# EAGLE board sensor_v10 (EAGLE 7.2.0)
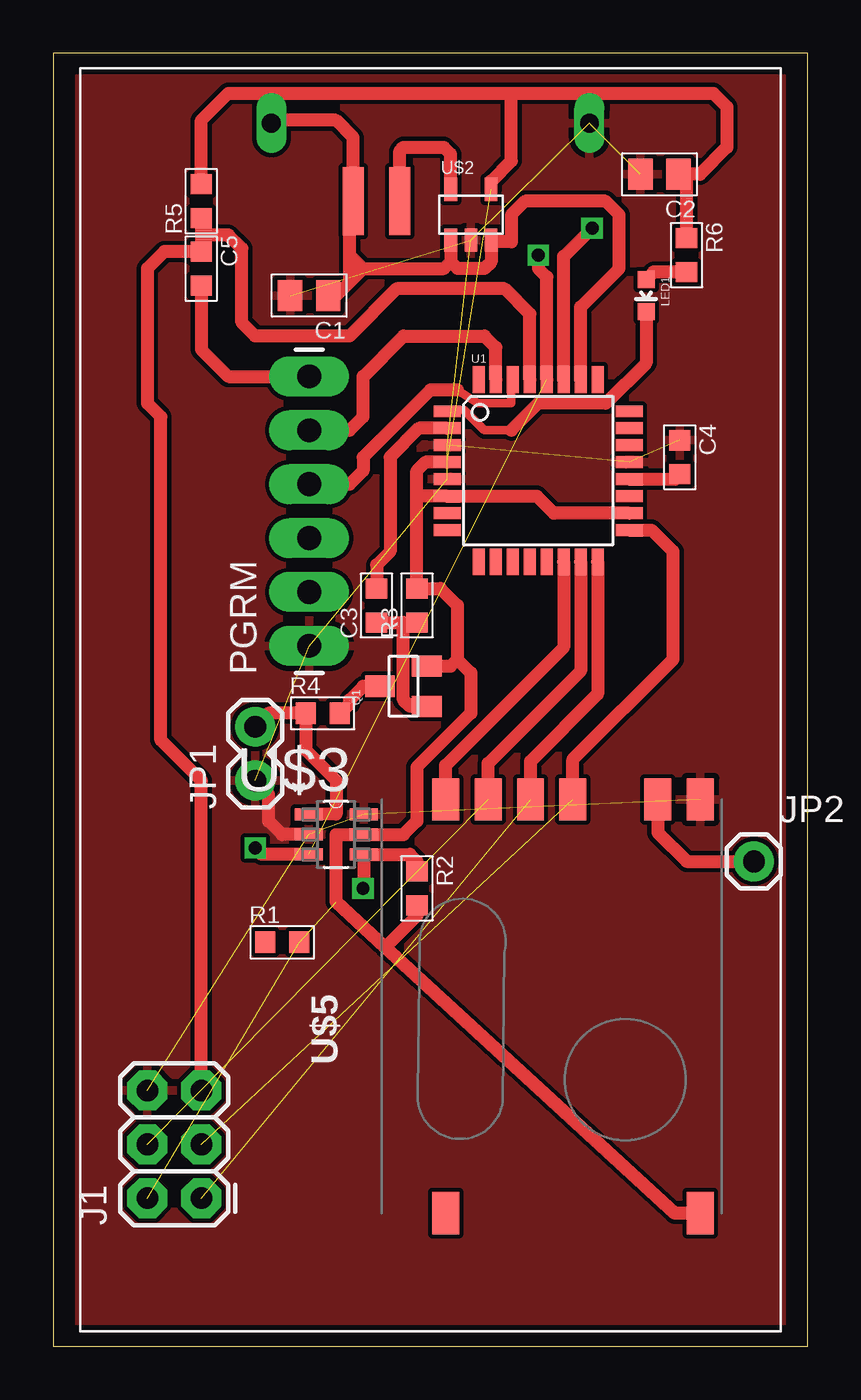
[diagram p0: board, top side]
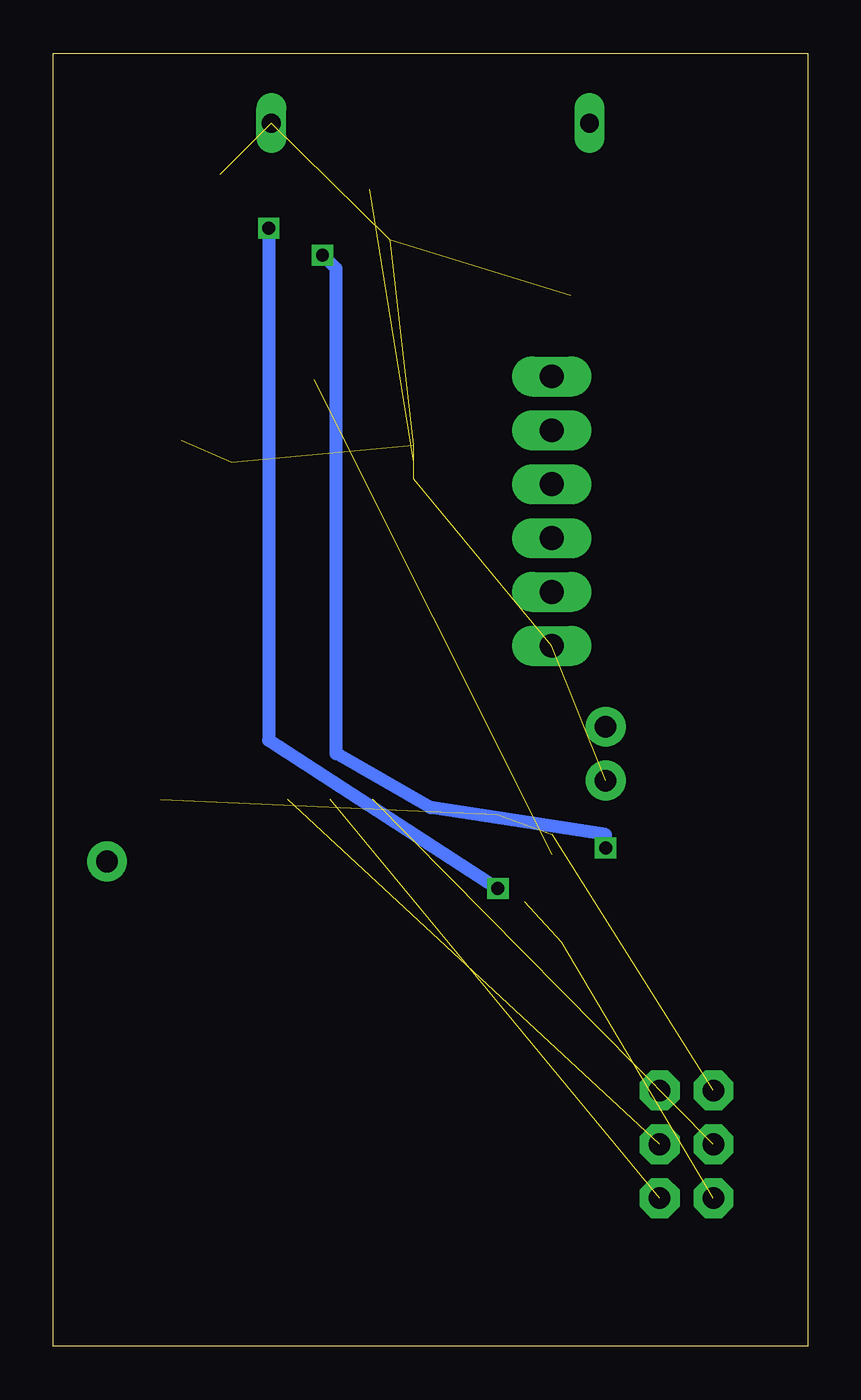
[diagram p1: board, bottom side, seen from below]

Size 35.56 x 60.96 mm. Coordinates in mm from the lower left corner, seen from the top.
Outline: 0,0 35.56,0 35.56,60.96 0,60.96 0,0
Copper layers (1*16): Top 0.035mm / dielectric 1.5mm / Bottom 0.035mm
Design rules "default": minimum track width 10mil, minimum drill 24mil, track to track 8mil, track to pad 8mil, pad to pad 8mil, via to via 8mil, smd to smd 8mil, copper to edge 40mil, drill to drill 8mil, minimum pad ring 10mil, minimum via ring 8mil, stop-mask expansion 4mil, vias tented up to drill 0mil, thermal gap 10mil

## Footprints (pad centres in the part's own frame; a part is rotated, then mirrored left to right if it is on the bottom)
C0805-N = smd 1.15 x 1.45: 1 -0.9,0; 2 0.9,0
C0603-N = smd 0.95 x 1: 1 -0.8,0; 2 0.8,0
2X3 = drill 1.016 pad 1.88 octagon: 1 0,0; 2 0,2.54; 3 2.54,0; 4 2.54,2.54; 5 5.08,0; 6 5.08,2.54
1X02 = drill 1.016 pad 1.88: 1 0,0; 2 2.54,0
1X01 = drill 1.016 pad 1.88: 1 0,0
LED-0603 = smd 0.8 x 0.8: A 0,-0.75; C 0,0.75
1X06_LONGPADS = drill 1.118 pad 1.88 long: 1 0,0; 2 2.54,0; 3 5.08,0; 4 7.62,0; 5 10.16,0; 6 12.7,0
SOT23 = smd 1 x 1.4: 1 -0.95,-1.1; 2 0.95,-1.1; 3 0,1.1
R0603-N = smd 0.95 x 1: 1 -0.8,0; 2 0.8,0
TQFP32-08 = smd 1.27 x 0.559: 1 -4.293,2.8; 2 -4.293,2; 3 -4.293,1.2; 4 -4.293,0.4; 5 -4.293,-0.4; 6 -4.293,-1.2; 7 -4.293,-2; 8 -4.293,-2.8; 17 4.293,-2.8; 18 4.293,-2; 19 4.293,-1.2; 20 4.293,-0.4; 21 4.293,0.4; 22 4.293,1.2; 23 4.293,2; 24 4.293,2.8 | smd 0.559 x 1.27: 9 -2.8,-4.293; 10 -2,-4.293; 11 -1.2,-4.293; 12 -0.4,-4.293; 13 0.4,-4.293; 14 1.2,-4.293; 15 2,-4.293; 16 2.8,-4.293; 25 2.8,4.293; 26 2,4.293; 27 1.2,4.293; 28 0.4,4.293; 29 -0.4,4.293; 30 -1.2,4.293; 31 -2,4.293; 32 -2.8,4.293
KEYSTONEAAHOLDER_2CELL = drill 0.889 pad 1.422 long: P$1 -7.493,27.178; P$2 7.493,27.178
SOT23-5 = smd 0.6 x 1.1: P$1 -0.95,-1.2; P$2 0,-1.2; P$3 0.95,-1.2; P$4 0.95,1.2; P$5 -0.95,1.2
SOT95P270X145-6N = smd 1.321 x 0.559: 1 -1.295,0.94; 2 -1.295,0; 3 -1.295,-0.94; 4 1.295,-0.94; 5 1.295,0; 6 1.295,0.94
WURTH_10UH_650MA = smd 3.2 x 1: P$1 0,-1.1; P$2 0,1.1
RFM69W-MINPADS = smd 2 x 1.27: ANA 8,-5; DIO0 -11.5,5; GND 8,-7; MISO 8,1; MOSI 8,3; NSS 8,5; SCK 8,-1; VDD -11.5,-7

## Placement (x,y rotation side)
C1  10uF  [C0805-N]  12.06,49.53 180 top
C2  10uF  [C0805-N]  28.57,55.24 180 top
C3  0.1uF  [C0603-N]  15.24,34.92 90 top
C4  0.1uF  [C0603-N]  29.53,41.91 270 top
C5  0.1uF  [C0603-N]  6.99,50.8 270 top
J1  AVR_SPI_PRG_6PTH  [2X3]  6.99,6.99 90 top
JP1  M02PTH  [1X02]  9.53,26.67 90 top
JP2  M01PTH  [1X01]  33.02,22.86 0 top
LED1  [LED-0603]  27.94,49.53 180 top
PGRM  [1X06_LONGPADS]  12.06,33.02 90 top
Q1  mosfet-N  [SOT23]  16.51,31.11 90 top
R1  10k  [R0603-N]  10.79,19.05 0 top
R2  10k  [R0603-N]  17.14,21.59 270 top
R3  10k  [R0603-N]  17.14,34.92 90 top
R4  [R0603-N]  12.7,29.84 0 top
R5  10k  [R0603-N]  6.99,53.98 90 top
R6  10k  [R0603-N]  29.84,51.44 270 top
U1  ATMEGA328P  [TQFP32-08]  22.86,41.27 0 top
U$1  KEYSTONEAAHOLDER_2CELL  [KEYSTONEAAHOLDER_2CELL]  17.78,30.48 0 top
U$2  TPS61097-33  [SOT23-5]  19.68,53.34 0 top
U$3  MCP3425A0T-E/CH  [SOT95P270X145-6N]  13.34,24.13 0 top
U$4  INDUCTORS_WURTH  [WURTH_10UH_650MA]  15.24,53.98 90 top
U$5  RFM69  [RFM69W-MINPADS]  23.5,17.78 90 top

## Library data of the parts
C1-C5 R1-R6 = passives-7351
J1 JP1 JP2 PGRM = SparkFun-Connectors
LED1 = SparkFun-LED
Q1 = SparkFun-DiscreteSemi; PROD_ID: TRANS-08345
U1 = SparkFun-DigitalIC; PROD_ID: IC-09069
U$1 U$2 U$4 = _my-parts
U$3 = Microchip_By_element14_Batch_1; MPN: MCP3425A0T-E/CH; OC_FARNELL: 1578433; OC_NEWARK: 88M9948; PACKAGE: SOT-6; SUPPLIER: Microchip
U$5 = LowPowerLab

## Nets
D2: U$5.DIO0
GND: C1.2 C2.2 C4.1 J1.6 JP1.1 PGRM.1 U1.3 U1.5 U1.21 U$1.P$2 U$2.P$2 U$3.2 U$3.6 U$5.GND
IRQ: U1.32
MISO: J1.1 U1.16 U$5.MISO
MOSI: J1.4 U1.15 U$5.MOSI
N$1: U$2.P$5 U$4.P$1
N$2: C3.1 Q1.1 R3.1
N$3: JP1.2 R4.1 U$3.1
N$4: C4.2 U1.20
N$5: LED1.C U1.1
N$6: Q1.3 R4.2
N$7: JP2.1 U$5.ANA
N$9: LED1.A R6.2
N$10: C5.2 PGRM.6
RST: C5.1 J1.5 R5.1 U1.29
RX: PGRM.4 U1.30
SCK: J1.3 U1.17 U$5.SCK
SCL: R1.1 U1.28 U$3.3
SDA: R2.1 U1.27 U$3.4
SENS_EN: C3.2 U1.2
SS: U1.14 U$5.NSS
TX: PGRM.5 U1.31
V3.3: C2.1 J1.2 Q1.2 R1.2 R2.2 R3.2 R5.2 R6.1 U1.4 U1.6 U1.18 U$2.P$4 U$3.5 U$5.VDD
VBAT: C1.1 U1.26 U$1.P$1 U$2.P$1 U$2.P$3 U$4.P$2

## Tracks (layer width: path | path; a pad name or v marks a point on that pad's centre or on a via)
GND  (12 unrouted)
  Top 0.61: U$3.2 10.79,24.13 10.16,24.77 10.16,26.04 JP1.1
  pour Top: -1.27,-1.27 36.83,-1.27 36.83,62.23 -1.27,62.23
MISO  (1 unrouted)
  Top 0.61: U$5.MISO 22.5,27.57 25.66,30.74 U1.16
MOSI  (1 unrouted)
  Top 0.61: U$5.MOSI 20.5,27.48 24.86,31.84 U1.15
N$1
  Top 0.61: U$2.P$5 18.73,56.2 18.41,56.52 16.51,56.52 16.34,56.34 U$4.P$1
N$2
  Top 0.61: C3.1 16.51,34.12 | 16.51,34.12 R3.1 | Q1.1 16.82,30.16 16.51,30.48 16.51,34.12
N$3
  Top 0.61: JP1.2 10.16,29.84 R4.1 11.9,28.11 13.34,26.67 13.34,25.09 U$3.1
N$4
  Top 0.61: U1.20 29.29,40.88 C4.2
N$5
  Top 0.406: 21.59,43.18 20.32,43.18 19.37,44.13 18.62,44.13 U1.1
  Top 0.61: LED1.C 27.94,46.35 26.04,44.45 22.86,44.45 21.59,43.18
N$6
  Top 0.61: Q1.3 14.61,31.11 13.97,30.48 13.97,30.32 R4.2
N$7
  Top 0.61: U$5.ANA 28.5,24.21 29.84,22.86 JP2.1
N$9
  Top 0.61: R6.2 28.3,50.63 LED1.A
N$10
  Top 0.61: C5.2 6.99,46.99 8.26,45.72 PGRM.6
RST
  Top 0.61: J1.5 6.99,26.67 5.08,28.57 5.08,43.81 4.45,44.45 4.45,50.8 5.25,51.6 C5.1 6.99,52.39 | 6.99,52.39 8.26,52.39 8.89,51.75 8.89,48.26 9.53,47.62 13.97,47.62 16.19,49.85 21.27,49.85 22.46,48.66 U1.29 | R5.1 6.99,52.39
RX
  Top 0.406: 19.05,45.09 20,44.45 21.59,44.45 21.59,45.5 U1.30
  Top 0.61: 19.05,45.09 17.78,45.09 14.61,41.91 14.61,41.27 13.97,40.64 PGRM.4
SCK  (1 unrouted)
  Top 0.61: U$5.SCK 24.5,27.67 29.21,32.38 29.21,37.47 28.2,38.48 U1.17
SCL  (via drill 0.6)  (1 unrouted)
  Top 0.61: U$3.3 9.83,23.19 v9.53,23.5 | v22.86,51.44 22.86,50.8 23.26,50.4 U1.28
  Bottom 0.61: v9.53,23.5 9.53,24.13 17.78,25.4 22.23,27.94 22.23,50.8 v22.86,51.44
SDA  (via drill 0.6)
  Top 0.61: v25.4,52.7 24.06,51.37 U1.27 | v14.61,21.59 14.63,21.61 U$3.4 16.82,23.19 17.14,22.86 R2.1
  Bottom 0.61: v14.61,21.59 25.4,28.57 v25.4,52.7
SENS_EN
  Top 0.61: U1.2 17.24,43.27 15.88,41.91 15.88,37.47 15.24,36.83 C3.2
SS
  Top 0.61: U$5.NSS 18.5,27.39 24.06,32.95 U1.14
TX
  Top 0.61: PGRM.5 13.97,43.18 14.61,43.81 14.61,45.72 16.51,47.62 20.32,47.62 20.86,47.09 U1.31
V3.3  (3 unrouted)
  Top 0.61: R5.2 6.99,57.78 8.26,59.05 21.59,59.05 | 21.59,59.05 31.11,59.05 31.75,58.42 31.75,56.52 30.48,55.24 C2.1 29.84,54.88 R6.1 | U$2.P$4 20.64,54.92 21.59,55.88 21.59,59.05 | 17.14,40.01 R3.2 18.25,35.73 19.05,34.92 19.05,32.38 | 17.14,40.01 17.14,41.27 17.55,41.67 U1.4 | 17.14,40.01 17.21,40.08 U1.6 22.79,40.08 23.59,39.27 U1.18 | Q1.2 18.73,32.06 19.05,32.38 | 19.05,32.38 19.68,31.75 19.68,29.84 17.14,27.3 17.14,24.77 16.51,24.13 U$3.5 13.34,24.13 13.34,20.95 15.66,18.82 | U$5.VDD 29.28,6.28 15.66,18.82 | R2.2 17.14,20.3 15.66,18.82
VBAT
  Top 0.61: U$2.P$1 18.73,51.12 | 18.73,51.12 18.41,50.8 14.61,50.8 | 18.73,51.12 19.05,50.8 20.32,50.8 20.64,51.12 U$2.P$3 20.7,52.07 21.59,52.07 21.59,53.34 22.23,53.98 26.04,53.98 26.67,53.34 26.67,50.8 24.86,48.99 U1.26 | C1.1 13.34,49.53 13.97,50.16 | 13.97,50.16 13.97,51.44 | 13.97,51.44 13.97,53.8 U$4.P$2 14.14,56.98 13.34,57.78 10.41,57.78 U$1.P$1 | 13.97,50.16 14.61,50.8 | 13.97,51.44 14.61,50.8